# EAGLE board Lab_6 (EAGLE 9.6.2)
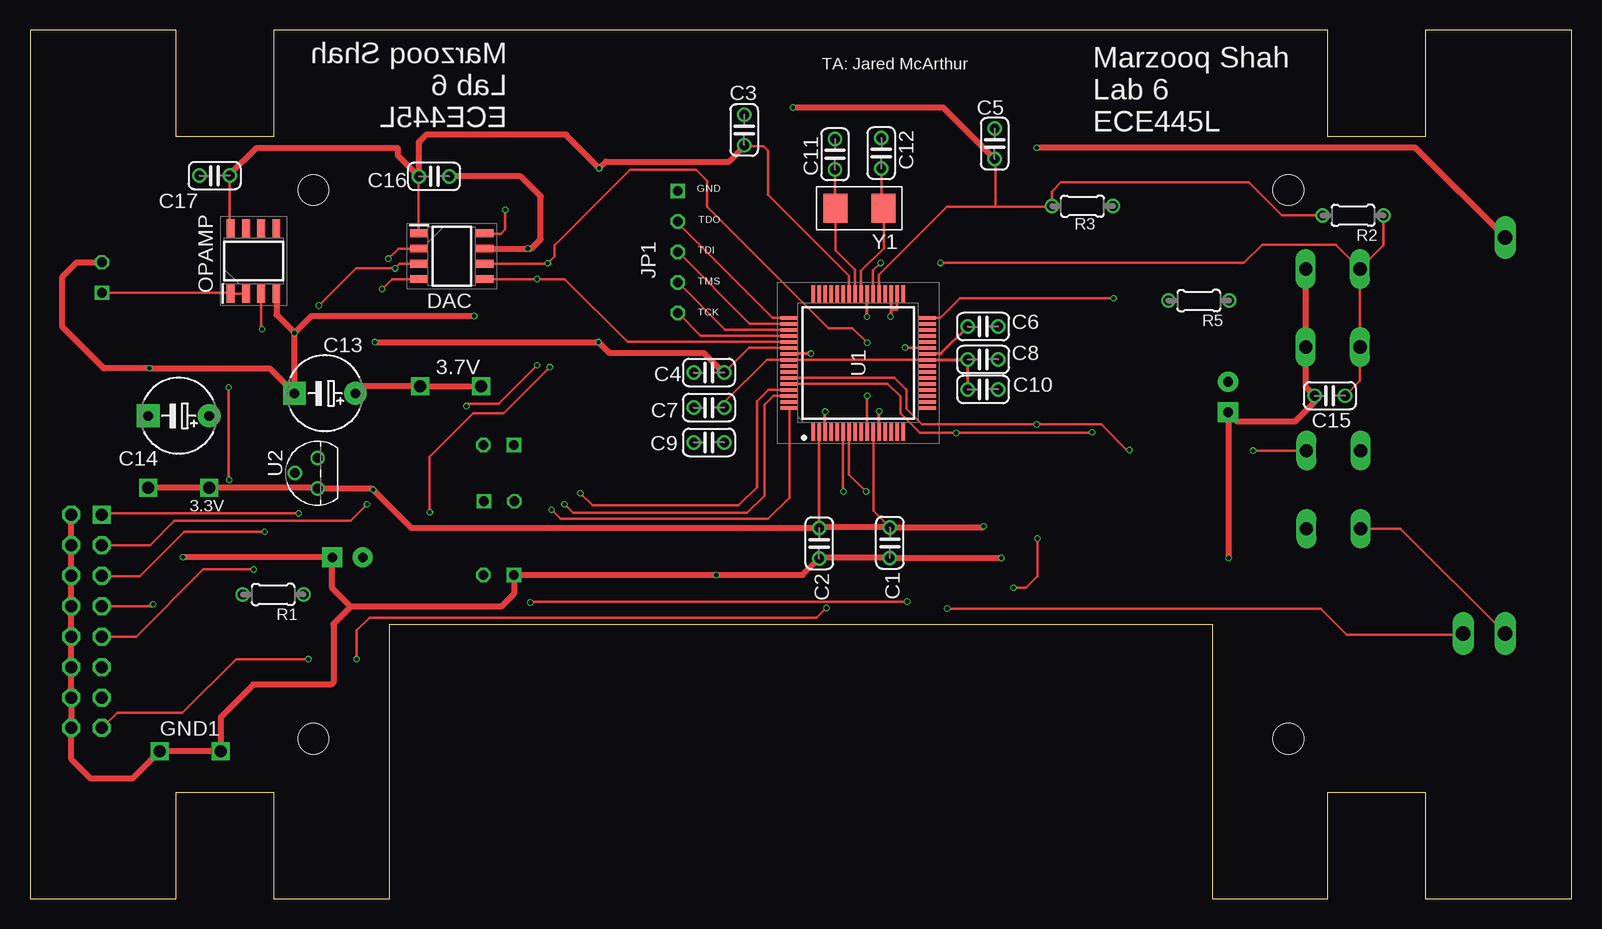
[diagram p0: board, top side]
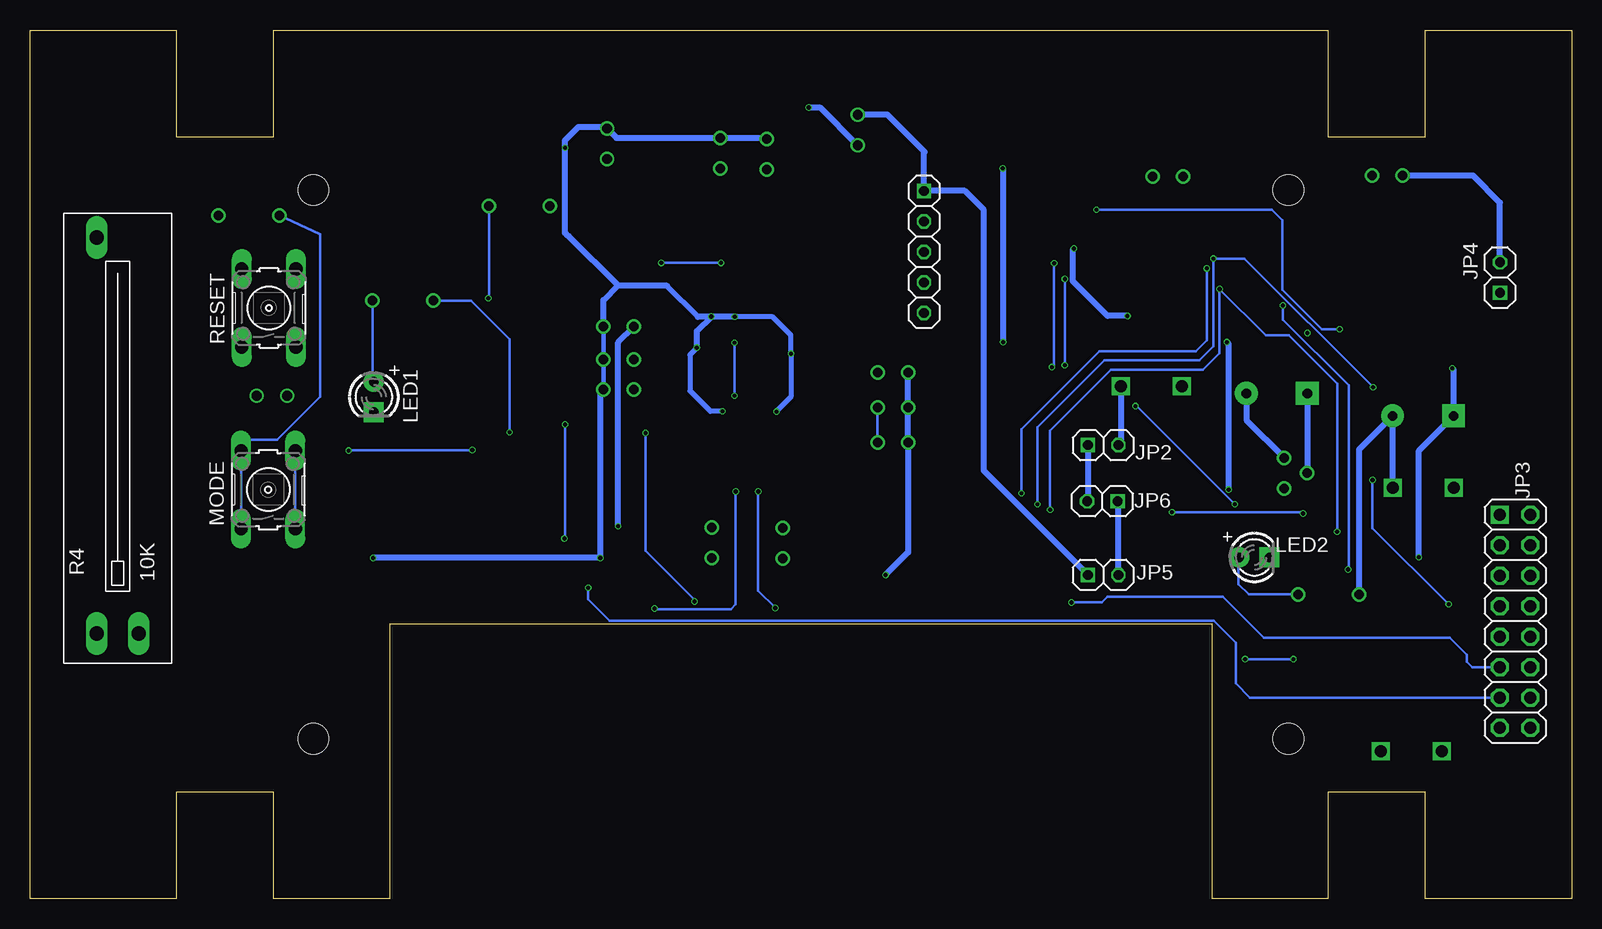
[diagram p1: board, bottom side, seen from below]

Size 128.52 x 72.39 mm. Coordinates in mm from the lower left corner, seen from the top.
Outline: 128.52,0 128.52,72.39 116.33,72.39 116.33,63.5 108.2,63.5 108.2,72.39 20.32,72.39 20.32,63.5 12.19,63.5 12.19,72.39 0,72.39 0,0 12.19,0 12.19,8.89 20.32,8.89 20.32,0 29.97,0 29.97,22.86 98.55,22.86 98.55,0 108.2,0 108.2,8.89 116.33,8.89 116.33,0 128.52,0
Copper layers (1*16): Top 0.035559375mm / dielectric 1.6mm / Bottom 0.035559375mm
Design rules "jlcpcb2layer": minimum track width 5mil, minimum drill 12mil, track to track 5mil, track to pad 5mil, pad to pad 5mil, via to via 5mil, smd to smd 5mil, copper to edge 8mil, drill to drill 6mil, minimum pad ring 5mil, minimum via ring 3mil, stop-mask expansion 2.5mil, vias tented up to drill 0mil, thermal gap 10mil
Holes 2.54 mm at 23.62,13.34 104.9,13.34 104.9,59.05 23.62,59.05

## Footprints (pad centres in the part's own frame; a part is rotated, then mirrored left to right if it is on the bottom)
TP_LOOP = drill 1 square: P$1 0,0; P$2 5.08,0
CAP100MIL = drill 0.8: 1 -1.27,0; 2 1.27,0
CAP200MILPOLARIZED = drill 0.8 pad 1.905: + -2.54,0 | drill 0.8 pad 1.905 square: - 2.54,0
SOIC127P600X175-8N = smd 1.525 x 0.65: 1 -2.712,1.905; 2 -2.712,0.635; 3 -2.712,-0.635; 4 -2.712,-1.905; 5 2.712,-1.905; 6 2.712,-0.635; 7 2.712,0.635; 8 2.712,1.905
1X05 = drill 0.8 square: 1 -5.08,0 | drill 0.8 octagon: 2 -2.54,0; 3 0,0; 4 2.54,0; 5 5.08,0
1X02 = drill 0.8 square: 1 -1.27,0 | drill 0.8 octagon: 2 1.27,0
2X08 = drill 1 square: 1 -8.89,-1.27 | drill 1 octagon: 2 -8.89,1.27; 3 -6.35,-1.27; 4 -6.35,1.27; 5 -3.81,-1.27; 6 -3.81,1.27; 7 -1.27,-1.27; 8 -1.27,1.27; 9 1.27,-1.27; 10 1.27,1.27; 11 3.81,-1.27; 12 3.81,1.27; 13 6.35,-1.27; 14 6.35,1.27; 15 8.89,-1.27; 16 8.89,1.27
LED3MM = drill 0.8 pad 1.676: A -1.27,0 | drill 0.8 pad 1.676 square: K 1.27,0
B3F-10XX = drill 1.1 long: 1 -3.251,2.261; 2 3.251,2.261; 3 -3.251,-2.261; 4 3.251,-2.261
SOIC127P600X175-8N' = smd 1.528 x 0.65: 1 -2.711,1.905; 2 -2.711,0.635; 3 -2.711,-0.635; 4 -2.711,-1.905; 5 2.711,-1.905; 6 2.711,-0.635; 7 2.711,0.635; 8 2.711,1.905
RES200MIL = drill 0.8: 1 -2.54,0; 2 2.54,0
PTA2043 = drill 1.194 long: 1 -13,1.75; 2 -13,-1.75; 3 20,1.75
QFP50P1200X1200X160-64N = smd 1.475 x 0.3: 1 -5.738,3.75; 2 -5.738,3.25; 3 -5.738,2.75; 4 -5.738,2.25; 5 -5.738,1.75; 6 -5.738,1.25; 7 -5.738,0.75; 8 -5.738,0.25; 9 -5.738,-0.25; 10 -5.738,-0.75; 11 -5.738,-1.25; 12 -5.738,-1.75; 13 -5.738,-2.25; 14 -5.738,-2.75; 15 -5.738,-3.25; 16 -5.738,-3.75; 33 5.738,-3.75; 34 5.738,-3.25; 35 5.738,-2.75; 36 5.738,-2.25; 37 5.738,-1.75; 38 5.738,-1.25; 39 5.738,-0.75; 40 5.738,-0.25; 41 5.738,0.25; 42 5.738,0.75; 43 5.738,1.25; 44 5.738,1.75; 45 5.738,2.25; 46 5.738,2.75; 47 5.738,3.25; 48 5.738,3.75 | smd 0.3 x 1.475: 17 -3.75,-5.738; 18 -3.25,-5.738; 19 -2.75,-5.738; 20 -2.25,-5.738; 21 -1.75,-5.738; 22 -1.25,-5.738; 23 -0.75,-5.738; 24 -0.25,-5.738; 25 0.25,-5.738; 26 0.75,-5.738; 27 1.25,-5.738; 28 1.75,-5.738; 29 2.25,-5.738; 30 2.75,-5.738; 31 3.25,-5.738; 32 3.75,-5.738; 49 3.75,5.738; 50 3.25,5.738; 51 2.75,5.738; 52 2.25,5.738; 53 1.75,5.738; 54 1.25,5.738; 55 0.75,5.738; 56 0.25,5.738; 57 -0.25,5.738; 58 -0.75,5.738; 59 -1.25,5.738; 60 -1.75,5.738; 61 -2.25,5.738; 62 -2.75,5.738; 63 -3.25,5.738; 64 -3.75,5.738
TO92 = drill 0.8: 1 -1.27,0; 2 0,1.905; 3 1.27,0
16MHZ_CRYSTAL = smd 2 x 2.4: OSC0 1,1.27; OSC1 5,1.27

## Placement (x,y rotation side)
3.3V  TP_LOOP  [TP_LOOP]  14.94,34.24 180 top
3.7V  TP_LOOP  [TP_LOOP]  37.59,42.72 180 top
C1  0.01uf  [CAP100MIL]  71.68,29.67 270 top
C2  0.1uf  [CAP100MIL]  65.79,29.62 270 top
C3  0.01uf  [CAP100MIL]  59.54,64.06 90 top
C4  0.1uf  [CAP100MIL]  56.59,43.84 180 top
C5  0.01uf  [CAP100MIL]  80.42,62.92 90 top
C6  1.0uf  [CAP100MIL]  79.45,47.68 0 top
C7  0.1uf  [CAP100MIL]  56.59,40.92 180 top
C8  0.1uf  [CAP100MIL]  79.45,44.93 0 top
C9  0.1uf  [CAP100MIL]  56.59,38.02 180 top
C10  2.2uf  [CAP100MIL]  79.45,42.44 0 top
C11  10pf  [CAP100MIL]  67.11,62.03 90 top
C12  10pf  [CAP100MIL]  70.97,62.13 90 top
C13  4.7uf  [CAP200MILPOLARIZED]  24.59,42.11 180 top
C14  4.7uf  [CAP200MILPOLARIZED]  12.4,40.23 180 top
C15  0.1uf  [CAP100MIL]  108.36,41.91 180 top
C16  0.1uf  [CAP100MIL]  33.68,60.2 0 top
C17  0.1uf  [CAP100MIL]  15.39,60.25 180 top
DAC  AD8300ARZ  [SOIC127P600X175-8N]  35.15,53.54 0 top
GND1  TP_LOOP  [TP_LOOP]  10.82,12.29 0 top
JP1  [1X05]  54,53.9 270 bottom
JP2  [1X02]  39.07,37.8 0 bottom
JP3  Logic Analyzer  [2X08]  4.72,23.11 270 bottom
JP4  [1X02]  5.99,51.77 90 bottom
JP5  [1X02]  39.07,26.97 0 bottom
JP6  [1X02]  39.12,33.12 180 bottom
LED1  [LED3MM]  99.87,41.81 270 bottom
LED2  [LED3MM]  26.47,28.45 0 bottom
MODE  [B3F-10XX]  108.66,34.09 90 bottom
OPAMP  RC4558D  [SOIC127P600X175-8N']  18.64,53.14 90 top
R1  1K  [RES200MIL]  20.27,25.35 180 top
R2  10K  [RES200MIL]  110.29,56.95 180 top
R3  1M  [RES200MIL]  87.73,57.71 0 top
R4  10K  [PTA2043]  121.21,35.1 90 bottom
R5  1K  [RES200MIL]  97.43,49.83 180 top
RESET  [B3F-10XX]  108.61,49.23 90 bottom
U1  TM4C123GH6PM  [QFP50P1200X1200X160-64N]  69.04,44.65 90 top
U2  LP2950-3.3ACZ  [TO92]  23.98,35.46 90 top
Y1  16MHZ_CRYSTAL  [16MHZ_CRYSTAL]  72.16,58.8 180 top

## Library data of the parts
3.3V 3.7V C1-C17 GND1 JP1-JP6 LED1 LED2 R1-R5 U1 U2 Y1 = EE445L
DAC = AD8300ARZ; DESCRIPTION: DAC 1-Ch R-2R 12-Bit 8-Pin SOIC; HEIGHT: 1.75mm; MANUFACTURER_NAME: Analog Devices; MANUFACTURER_PART_NUMBER: AD8300ARZ; MOUSER_PART_NUMBER: 584-AD8300ARZ; MOUSER_PRICE-STOCK: https://www.mouser.co.uk/ProductDetail/Analog-Devices/AD8300ARZ?qs=%2FtpEQrCGXCy4SzE5uMQsTQ%3D%3D
MODE RESET = EE445L; MPN: B3F-1000; OC_FARNELL: 176432; OC_NEWARK: 36M3542
OPAMP = RC4558D; DESCRIPTION: RC4558DG4, Dual Operational Amplifier 3MHz, 8-Pin SOIC; HEIGHT: 1.75mm; MANUFACTURER_NAME: Texas Instruments; MANUFACTURER_PART_NUMBER: RC4558D; MOUSER_PART_NUMBER: 595-RC4558D; MOUSER_PRICE-STOCK: https://www.mouser.co.uk/ProductDetail/Texas-Instruments/RC4558D?qs=fvkeCqCHl3A1nZVdQC3xwQ%3D%3D

## Nets
+3.7V: 3.7V.P$1 3.7V.P$2 C13.+ JP2.2 U2.3
+3V3: 3.3V.P$1 3.3V.P$2 C1.1 C2.1 C3.1 C4.1 C5.1 C6.1 C14.+ C16.1 C17.1 DAC.1 MODE.1 MODE.2 OPAMP.8 R1.2 R2.2 R3.1 R4.1 U1.2 U1.11 U1.26 U1.37 U1.42 U1.54 U2.1
+BAT: JP5.2 JP6.1
ANALOGOUT: JP4.1 OPAMP.1 OPAMP.2
GND: C1.2 C2.2 C3.2 C4.2 C5.2 C6.2 C7.2 C8.2 C9.2 C10.2 C11.2 C12.2 C13.- C14.- C15.2 C16.2 C17.2 DAC.7 GND1.P$1 GND1.P$2 JP1.1 JP3.2 JP3.4 JP3.6 JP3.8 JP3.10 JP3.12 JP3.14 JP3.16 JP4.2 JP5.1 LED1.K LED2.K OPAMP.4 R4.3 RESET.3 RESET.4 U1.3 U1.12 U1.27 U1.34 U1.35 U1.39 U1.55 U2.2
LEDVOLTAGE: LED1.A R5.1
OSC0: C12.1 U1.40 Y1.OSC0
OSC1: C11.1 U1.41 Y1.OSC1
PD0: DAC.3 JP3.9 U1.61
PD1: DAC.2 JP3.7 U1.62
PD3: DAC.4 JP3.5 U1.64
PD6: DAC.5 JP3.3 U1.53
PD7: DAC.6 JP3.1 U1.10
PE2: R4.2 U1.7
PE3: JP3.15 U1.6
PE4: JP3.13 MODE.3 MODE.4 U1.59
PE5: JP3.11 R5.2 U1.60
POWERLED: LED2.A R1.1
RESET: C15.1 R2.1 RESET.1 RESET.2 U1.38
SWITCHEDPOWER: JP2.1 JP6.2
TCK: JP1.5 U1.52
TDI: JP1.3 U1.50
TDO: JP1.2 U1.49
TMS: JP1.4 U1.51
VDDC: C7.1 C8.1 C9.1 C10.1 U1.25 U1.56
VOUT: DAC.8 OPAMP.3
WAKE: R3.2 U1.32

## Tracks (layer width: path | path; a pad name or v marks a point on that pad's centre or on a via)
+3.7V
  Top 0.508: C13.+ 27.74,42.72 3.7V.P$2 3.7V.P$1
  Bottom 0.508: C13.+ 27.13,39.88 U2.3 | 3.7V.P$1 37.59,38 JP2.2
+3V3  (via drill 0.35)
  Top 0.203: U1.2 C2.1 | U1.11 70.31,38.9 70.31,32.31 C1.1 | U1.54 59.92,45.9 C4.1 | U1.37 70.79,51.99 76.45,57.66 80.47,57.66 | 80.47,57.66 80.47,61.6 C5.1 | 80.47,57.66 85.14,57.66 R3.1 85.19,58.93 85.95,59.69 101.6,59.69 104.34,56.95 R2.2 | MODE.1 114.23,30.84 R4.1 | C17.1 16.66,55.92 OPAMP.8 | C16.1 32.42,55.47 DAC.1 | U1.42 68.29,51.91 61.52,58.67 61.52,62.33 61.16,62.69 59.54,62.69
  Top 0.254: C6.1 75.91,45.4 U1.26
  Top 0.508: 3.3V.P$2 3.3V.P$1 23.93,34.24 U2.1 28.5,34.19 v28.6,34.09 31.8,30.89 C2.1 65.84,30.94 C1.1 79.4,30.94 v79.5,31.04 | v28.75,46.38 v47.4,46.38 48.31,45.47 56.19,45.47 57.81,43.84 C4.1 | v63.6,65.94 76.12,65.94 C5.1 | C17.1 16.66,60.35 18.85,62.53 30.68,62.53 30.68,61.93 C16.1 32.41,63.04 33.02,63.65 44.76,63.65 44.76,63.55 v47.45,60.86 48.01,61.42 58.27,61.42 59.54,62.69 C3.1
  Bottom 0.203: R2.2 104.34,55.37 104.34,41.81 107.9,38.25 110.13,38.25 110.92,37.47 MODE.2 MODE.1
  Bottom 0.508: 3.3V.P$1 C14.+ 17.73,37.44 R1.2 | v28.6,34.09 28.6,46.23 v28.75,46.38 | v79.5,31.04 79.5,46.36 C6.1 | v47.4,46.38 47.4,60.81 v47.45,60.86 | v63.6,65.94 62.69,65.94 C3.1
+BAT
  Bottom 0.508: JP6.1 37.85,27.03 JP5.2
ANALOGOUT
  Top 0.203: JP4.1 16.67,50.5 OPAMP.1 OPAMP.2
GND  (via drill 0.35)
  Top 0.203: 69.77,50.38 U1.39 | U1.27 72.97,45.9 v72.95,45.92 | v65.09,45.42 65.07,45.4 | v70.79,40.61 | U1.34 72.29,49.07 71.79,49.07
  Top 0.254: v69.77,48.49 69.77,50.38 | U1.3 v66.29,40.59 | 65.07,45.4 U1.55 | U1.12 v70.79,40.61 | U1.35 71.79,49.07 71.79,48.57 v71.73,48.51
  Top 0.508: v80.98,28.4 C1.2 65.84,28.4 C2.2 64.41,26.97 v57.2,26.97 JP5.1 40.34,25.4 39.27,24.33 26.72,24.33 | R4.3 115.48,62.59 v83.92,62.59 | v99.92,28.4 99.92,40.49 LED1.K 100.64,39.78 105.46,39.78 107.09,41.4 C15.2 106.35,42.65 RESET.3 RESET.4 | 26.72,24.33 25.2,25.86 LED2.K v12.75,28.45 | JP4.2 3.91,53.04 2.69,51.82 2.69,47.65 6.15,44.2 v9.96,44.2 19.96,44.2 C13.- v22.05,47.14 | 26.72,24.33 25.3,22.91 25.3,18.03 25.1,17.83 18.59,17.83 15.9,15.14 GND1.P$2 GND1.P$1 8.53,10.01 5.08,10.01 3.45,11.63 JP3.16 JP3.14 JP3.12 JP3.10 JP3.8 JP3.6 JP3.4 JP3.2 | OPAMP.4 20.55,48.64 v22.05,47.14 | DAC.7 v41.5,54.18 41.78,54.18 42.57,54.97 42.57,58.52 40.89,60.2 C16.2 | v22.05,47.14 23.47,48.56 v37.03,48.56
  Bottom 0.203: v66.29,40.59 66.29,40.61
  Bottom 0.381: C10.2 80.72,45.28 80.64,45.36 C8.2 C6.2
  Bottom 0.406: 66.29,40.61 65.09,41.81 v65.09,45.42 65.09,46.96 66.62,48.49 v69.77,48.49 | v72.95,45.92 72.95,45.87 73.51,45.31 73.51,42.32 71.81,40.61 v70.79,40.61 | 72.85,48.49 75.41,51.05
  Bottom 0.508: v57.2,26.97 55.32,28.85 C9.2 C7.2 C4.2 | C10.2 80.98,42.19 v80.98,28.4 v99.92,28.4 | C6.2 80.72,49.89 79.5,51.1 | 79.5,51.1 75.46,51.1 75.41,51.05 | 79.5,51.1 83.62,55.22 83.67,55.22 83.92,55.47 v83.92,62.59 83.92,63.2 82.8,64.31 80.54,64.31 C5.2 79.63,63.4 C12.2 67.21,63.4 C11.2 | v12.75,28.45 12.75,37.34 C14.- 9.86,44.09 v9.96,44.2 | JP5.1 49.02,35.66 49.02,57.4 50.6,58.98 JP1.1 54,62.18 53.95,62.23 57.05,65.33 C3.2 | JP4.2 5.99,58.01 8.23,60.25 C17.2 | v37.03,48.56 38.71,48.56 41.61,51.46 41.61,54.08 v41.5,54.18 | C13.- 22.05,35.48 U2.2 | v69.77,48.49 69.8,48.51 v71.73,48.51 | v71.73,48.51 72.82,48.51 72.85,48.49 | v71.73,48.51 72.95,47.29 v72.95,45.92
LEDVOLTAGE
  Bottom 0.203: R5.1 99.97,43.18 LED1.A
OSC0
  Top 0.203: U1.40 69.29,52.32 71.17,54.2 71.17,57.52 Y1.OSC0 70.97,57.72 C12.1
OSC1
  Top 0.203: U1.41 68.79,52.42 67.16,54.05 Y1.OSC1 67.11,57.59 C11.1
PD0  (via drill 0.35)
  Top 0.203: U1.61 61.56,42.4 60.6,41.45 60.6,34.29 59.08,32.77 46.89,32.77 v45.87,33.78 | DAC.3 30.81,52.91 v30.43,52.53 27.18,52.53 v24.08,49.43 | v18.64,27.43 14.43,27.43 8.84,21.84 JP3.9
  Bottom 0.203: v45.87,33.78 45.87,39.12 39.37,45.62 31.34,45.62 30.43,46.53 v30.43,52.53 | v24.08,49.43 24.08,48.26 18.59,42.77 18.59,27.48 v18.64,27.43
PD1  (via drill 0.35)
  Top 0.203: U1.62 61.97,41.9 61.21,41.15 61.21,33.58 59.79,32.16 45.26,32.16 v44.55,32.87 | v29.87,53.34 30.71,54.18 DAC.2 | v16.56,42.62 16.56,34.93 v16.61,34.88 | v10.26,24.54 10.11,24.38 JP3.7
  Bottom 0.203: v44.55,32.87 44.55,39.27 38.96,44.86 31.04,44.86 29.87,46.02 v29.87,53.34 27.28,53.34 v16.56,42.62 | v16.61,34.88 16.61,30.89 v10.26,24.54
PD3  (via drill 0.35)
  Top 0.203: U1.64 63.3,33.43 61.52,31.65 44.25,31.65 v43.49,32.41 | v29.36,50.8 30.2,51.64 DAC.4 | v19.56,30.58 12.85,30.58 9.14,26.87 6.05,26.87 JP3.5
  Bottom 0.203: v43.49,32.41 43.49,39.01 38.41,44.09 30.73,44.09 29.36,45.47 v29.36,50.8 25.5,46.94 23.57,46.94 19.56,42.93 v19.56,30.58
PD6  (via drill 0.35)
  Top 0.203: U1.53 49.81,46.4 44.58,51.64 v42.27,51.64 DAC.5 | JP3.3 10.01,29.46 12.04,31.5 26.72,31.5 v28.09,32.87 | v36.37,41.05 36.58,41.25 39.07,41.25 v42.27,44.45
  Bottom 0.203: v28.09,32.87 36.27,41.05 v36.37,41.05 | v42.27,44.45 v42.27,51.64
PD7  (via drill 0.35)
  Top 0.203: U1.10 69.79,41.9 v69.8,41.91 | v69.8,46.33 68.58,47.55 66.55,47.55 56.44,57.66 56.44,59.84 55.52,60.76 50.04,60.76 43.74,54.46 43.74,53.54 v43.15,52.96 43.1,52.91 DAC.6 | v43.33,44.3 39.47,40.44 36.93,40.44 33.33,36.83 v33.33,32.21 | v22.4,32.11 6.1,32.11 JP3.1
  Bottom 0.203: v69.8,41.91 v69.8,46.33 | v43.15,52.96 43.15,44.48 v43.33,44.3 | v33.33,32.21 22.5,32.21 v22.4,32.11
PE2  (via drill 0.35)
  Top 0.203: U1.7 68.29,35.34 v69.7,33.93 | v76.45,24.18 107.59,24.18 109.78,22 119.35,22 R4.2
  Bottom 0.203: v69.7,33.93 69.7,24.54 70.1,24.13 76.4,24.13 v76.45,24.18
PE3  (via drill 0.35)
  Top 0.203: U1.6 67.79,33.97 v67.82,33.93 | v66.4,24.23 65.58,23.42 28.3,23.42 27.23,22.35 v27.23,19.96 | v23.22,19.96 17.17,19.96 12.7,15.49 7.26,15.49 JP3.15
  Bottom 0.203: v67.82,33.93 67.82,25.65 v66.4,24.23 | v27.23,19.96 v23.22,19.96
PE4  (via drill 0.35)
  Top 0.203: U1.59 72.07,43.4 73.05,42.42 73.05,40.84 74.37,39.52 v83.92,39.52 89.31,39.52 91.44,37.39 v91.64,37.39 | v101.96,37.34 MODE.4 | v83.97,30.02 83.97,26.87 83.01,25.91 v81.99,25.91
  Bottom 0.203: v91.64,37.39 101.91,37.39 v101.96,37.34 | v83.92,39.52 83.92,30.07 v83.97,30.02 | v81.99,25.91 81.99,24.94 80.21,23.16 29.85,23.16 27.99,21.31 27.99,17.93 26.82,16.76 JP3.13 | MODE.4 MODE.3
PE5  (via drill 0.35)
  Top 0.203: U1.60 71.5,42.9 72.54,41.86 72.54,40.44 74.17,38.81 v77.22,38.81 88.49,38.81 v88.54,38.86 | v73.13,24.77 41.78,24.77 v41.71,24.69
  Bottom 0.203: v88.54,38.86 88.54,46.63 91.75,49.83 R5.2 | v77.22,38.81 77.22,29.01 72.95,24.74 73.03,24.66 v73.13,24.77 | v41.71,24.69 39.17,24.69 38.71,25.15 38.68,25.17 29.08,25.17 25.65,21.74 10.16,21.74 8.74,20.32 8.74,19.76 8.28,19.3 JP3.11
POWERLED
  Bottom 0.203: R1.1 26.92,25.35 27.79,26.21 27.79,28.4 LED2.A
RESET  (via drill 0.35)
  Top 0.203: U1.38 70.29,52.35 v70.92,52.98 | RESET.2 108.84,54.51 102.72,54.51 101.19,52.98 v75.9,52.98 | RESET.2 112.83,54.43 R2.1 | RESET.2 RESET.1 110.87,43.15 C15.1
  Bottom 0.203: v70.92,52.98 v75.9,52.98
SWITCHEDPOWER
  Bottom 0.508: JP2.1 40.34,33.17 JP6.2
TCK
  Top 0.203: U1.52 55.92,46.9 JP1.5
TDI
  Top 0.203: U1.50 60,47.9 JP1.3
TDO
  Top 0.203: U1.49 61.88,48.4 53.84,56.44 JP1.2
TMS
  Top 0.203: U1.51 57.96,47.4 JP1.4
VDDC
  Top 0.203: 78.17,44.9 C8.1 | C7.1 57.86,41.35 61.42,44.91 U1.56 65.73,44.9 65.74,44.91 72.8,44.91 72.8,44.9 U1.25
  Top 0.254: U1.25 78.17,44.9 | C10.1 C8.1
  Bottom 0.203: C9.1 C7.1
VOUT  (via drill 0.35)
  Top 0.203: OPAMP.3 19.28,47.47 19.3,47.45 v19.36,47.45 | v39.62,57.4 39.62,55.78 39.27,55.42 37.89,55.42 DAC.8
  Bottom 0.203: v19.36,47.45 20.83,47.45 24.13,50.75 24.13,56.54 24.99,57.4 v39.62,57.4
WAKE  (via drill 0.35)
  Top 0.203: U1.32 75.89,48.4 77.52,50.04 v90.32,50.04
  Bottom 0.203: v90.32,50.04 90.27,50.09 R3.2

## Text on the board
tPlace: TA: Jared McArthur | Marzooq Shah / Lab 6 / ECE445L | Marzooq Shah / Lab 6 / ECE445L | GND | TDO | TDI | TMS | TCK